# Altium PCB PCB_OPM MegaMod_2021-11-01.pcbdoc
Units mil, origin at the board's own origin, x right, y up, seen from the top; angles counter-clockwise.
Board outline 4520 x 3340 mil, 2 copper layers (Top Layer, Bottom Layer); 31 components, 45 nets, 164 pads, 18 vias.
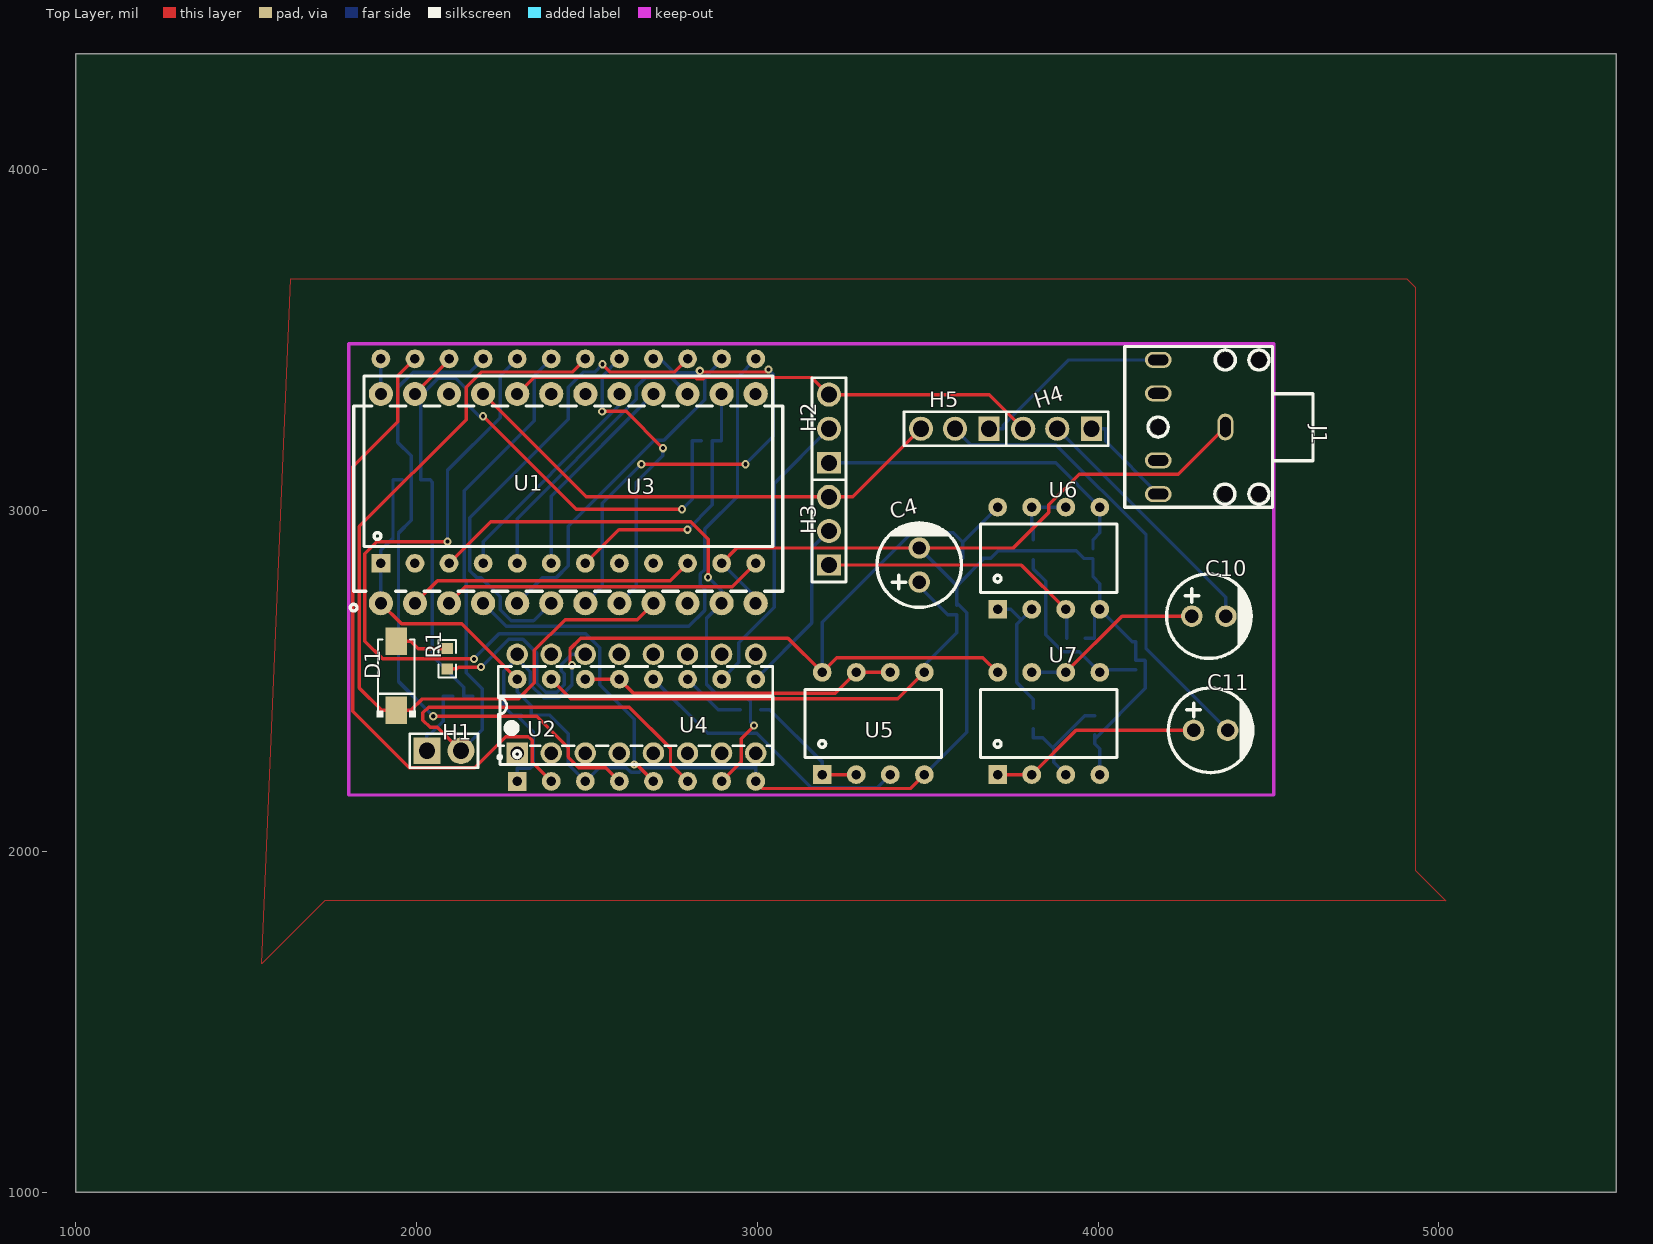
[diagram p0: Top Layer view]
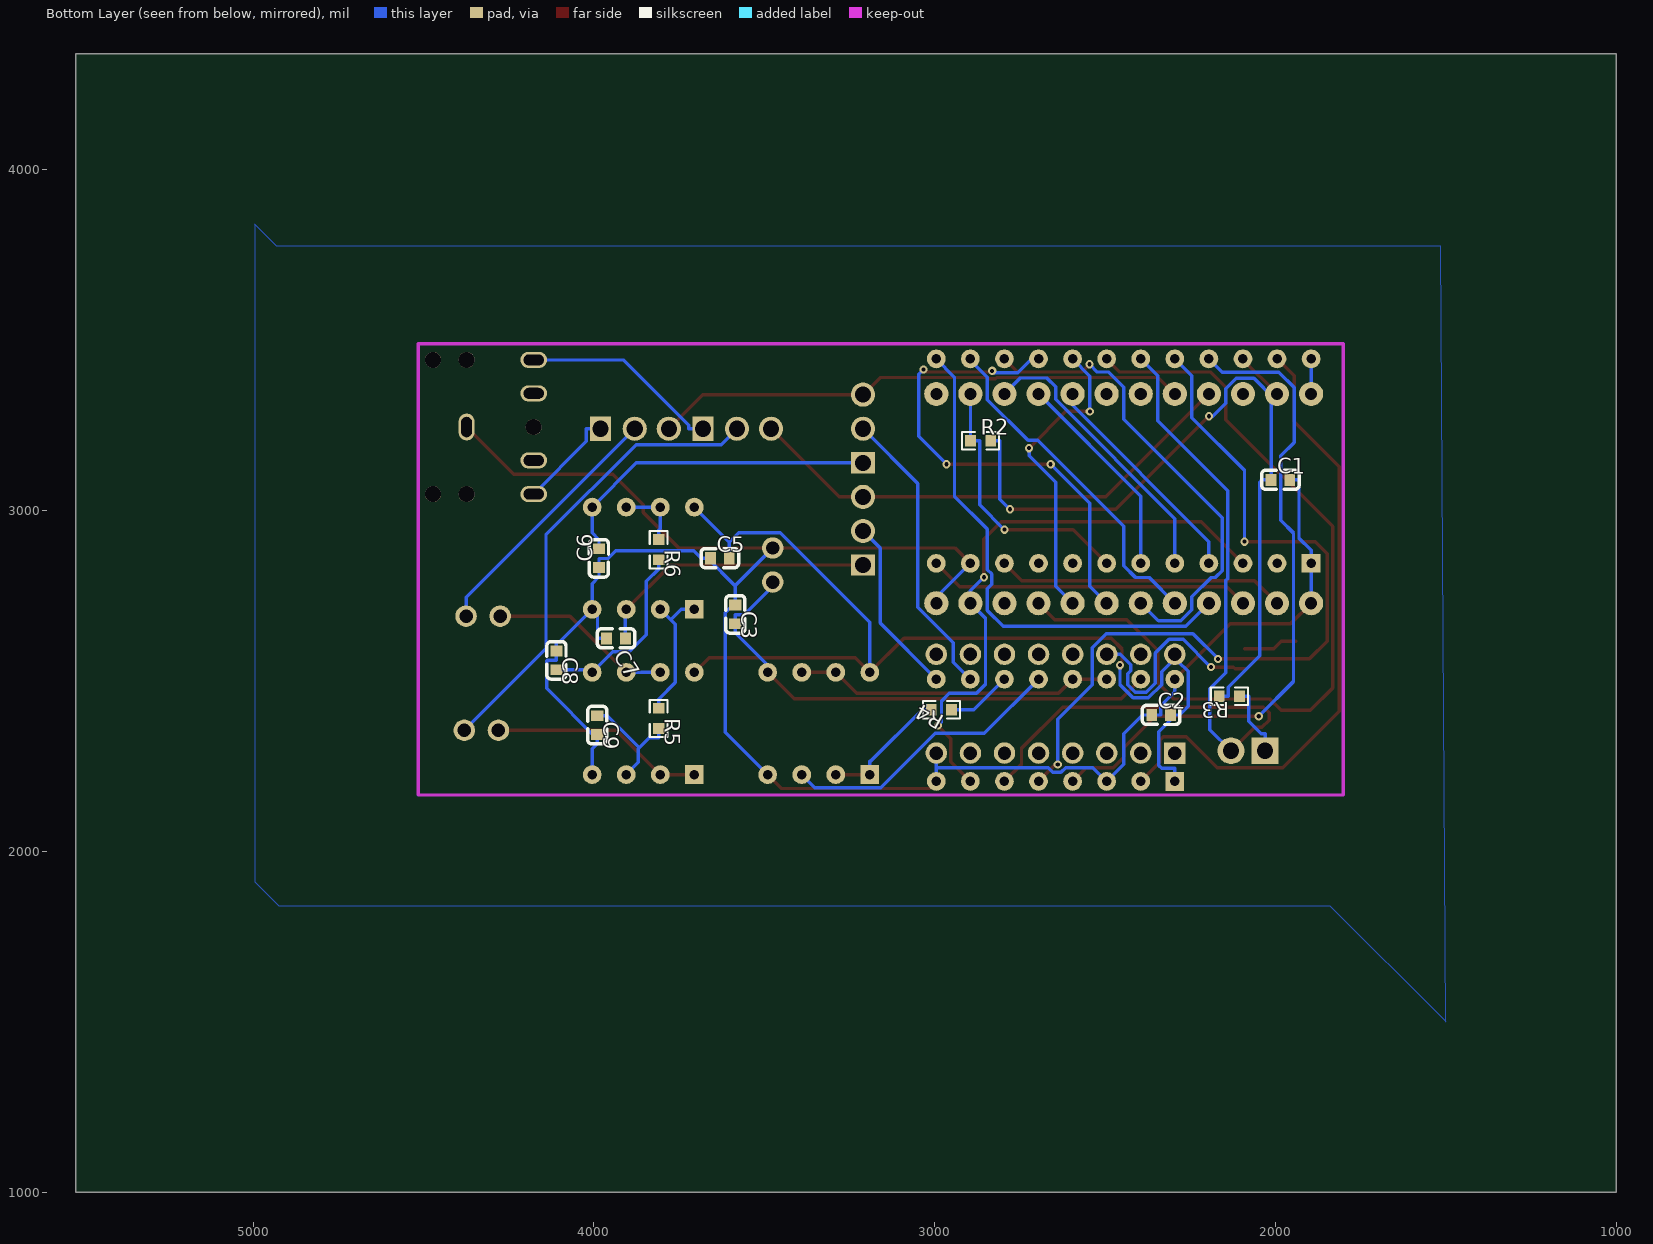
[diagram p1: Bottom Layer view, seen from below]

## Layer stack, top to bottom
Top Layer: signal copper (thickness not stored)
Dielectric: dielectric 12.6, FR-4, Dk 4.8
Bottom Layer: signal copper (thickness not stored)

## Board outline
5520,1000 1000,1000 1000,4340 5520,4340

## Components (designator, comment, footprint, x,y, rotation, side; value= is the part's Value field where it differs from the comment)
C1 "0.1u" C0603 1985,3090 r0 bottom
C2 "0.1u" C0603 2335,2400 r0 bottom
C3 "0.1u" C0603 3585,2695 r90 bottom
C4 "10uF" CAP-TH_BD6.3-P2.50-D1.0-FD 3475,2840 r90 top
C5 "0.1u" C0603 3630,2860 r0 bottom
C6 "1.8n" C0603 3985,2860 r270 bottom
C7 "1.8n" C0603 3935,2625 r180 bottom
C8 "10n" C0603 4110,2560 r90 bottom
C9 "10n" C0603 3990,2370 r90 bottom
C10 "4.7uF" CAP-TH_BD6.3-P2.50-D1.0-FD 4325,2690 r0 top
C11 "4.7uF" CAP-TH_BD6.3-P2.50-D1.0-FD 4330,2355 r0 top
D1 "SS14" SMA_L4.4-W2.8-LS5.4-RD 1940,2515 r90 top
H1 "YM2414B 兼容" HDR-TH_2P-P2.54-V-M 2080,2295 r0 top
H2 "Header-Male-2.54_1x3" HDR-TH_3P-P2.54-V-M-1 3210,3240 r90 top
H3 "Header-Male-2.54_1x3" HDR-TH_3P-P2.54-V-M-1 3210,2940 r90 top
H4 "Header-Male-2.54_1x3" HDR-TH_3P-P2.54-V-M-1 3880,3240 r180 top
H5 "Header-Male-2.54_1x3" HDR-TH_3P-P2.54-V-M-1 3580,3240 r180 top
J1 "PJ-307C" AUDIO-TH_PJ307C 4275,3245 r270 top
R1 "1k" R0603#1 2090,2565 r90 top
R2 "62k" R0603#2 2865,3205 r0 bottom
R3 "2.2k" R0603#2 2135,2455 r180 bottom
R4 "100" R0603#2 2980,2415 r180 bottom
R5 "3.6k" R0603#2 3810,2390 r90 bottom
R6 "3.6k" R0603#2 3810,2885 r90 bottom
U1 "MegaGRRL IC-FM" DIP-24_L32.0-W13.8-P2.54-LS15.6-BL 2445,3035 r0 top
U2 "MegaGRRL IC-DCSG" DIP-16_L20.4-W5.8-P2.54-LS7.6-BL 2644.88,2433.07 r0 top
U3 "YM2151" DIP24-600 2445,3145 r0 top
U4 "YM3012" DIP16 2645,2355 r0 top
U5 "SA5532AP" DIP8 3340,2375 r0 top
U6 "SA5532AP" DIP8 3855,2860 r0 top
U7 "SA5532AP" DIP8 3855,2375 r0 top

## Footprints (in the part's own frame and the unit in brackets; to place one, negate y for a bottom-side part, rotate by r counter-clockwise, add the part's x,y. Pads: shape width x height; smd on the part's side, far side on the other; paste and mask are expansions set on the pad)
AUDIO-TH_PJ307C [mm]
  oval 2x1.2 hole 0.8 slot 1.5 at 0 deg: 1(0,2.5)
  oval 1.2x2 hole 0.8 slot 1.5 at 90 deg: 2(5,-2.5) 3(2.489,-2.5) 4(-2.511,-2.5) 5(-5,-2.5)
  round 1.2 hole 1.2 unplated: ""(-5,2.5) ""(-5,5) ""(0,-2.5) ""(5,2.5) ""(5,5)
  silkscreen extent -6.01,-4.99 5.99,9.03
C0603 [mm]
  rect 0.8x0.9 smd: 1(0.7,0) 2(-0.7,0)
  silkscreen extent -1.39,-0.72 1.41,0.71
CAP-TH_BD6.3-P2.50-D1.0-FD [mm]
  round 1.6 hole 1: 1(-1.27,0) 2(1.27,0)
  silkscreen extent -3.15,-3.15 3.17,3.15
DIP8 [mil]
  rect 55x55 hole 28: 1(-150,-150)
  round 55 hole 28: 2(-50,-150) 3(50,-150) 4(150,-150) 5(150,150) 6(50,150) 7(-50,150) 8(-150,150)
  silkscreen extent -200,-100 200,100
DIP16 [mil]
  rect 55x55 hole 28: 1(-350,-150)
  round 55 hole 28: 2(-250,-150) 3(-150,-150) 4(-50,-150) 5(50,-150) 6(150,-150) 7(250,-150) 8(350,-150) 9(350,150) 10(250,150) 11(150,150) 12(50,150) 13(-50,150) 14(-150,150) 15(-250,150) 16(-350,150)
  silkscreen extent -400,-100 400,100
DIP24-600 [mil]
  rect 55x55 hole 28: 1(-550,-300)
  round 55 hole 28: 2(-450,-300) 3(-350,-300) 4(-250,-300) 5(-150,-300) 6(-50,-300) 7(50,-300) 8(150,-300) 9(250,-300) 10(350,-300) 11(450,-300) 12(550,-300) 13(550,300) 14(450,300) 15(350,300) 16(250,300) 17(150,300) 18(50,300) 19(-50,300) 20(-150,300) 21(-250,300) 22(-350,300) 23(-450,300) 24(-550,300)
  silkscreen extent -600,-250 600,250
DIP-16_L20.4-W5.8-P2.54-LS7.6-BL [mm]
  rect 1.6x1.6 hole 1: 1(-8.89,-3.68)
  round 1.6 hole 1: 2(-6.35,-3.68) 3(-3.81,-3.68) 4(-1.27,-3.68) 5(1.27,-3.68) 6(3.81,-3.68) 7(6.35,-3.68) 8(8.89,-3.68) 9(8.89,3.68) 10(6.35,3.68) 11(3.81,3.68) 12(1.27,3.68) 13(-1.27,3.68) 14(-3.81,3.68) 15(-6.35,3.68) 16(-8.89,3.68)
  silkscreen extent -10.31,-4.1 10.16,2.77
DIP-24_L32.0-W13.8-P2.54-LS15.6-BL [mm]
  round 1.8 hole 0.9: 1(-13.97,-7.8) 2(-11.43,-7.8) 3(-8.89,-7.8) 4(-6.35,-7.8) 5(-3.81,-7.8) 6(-1.27,-7.8) 7(1.27,-7.8) 8(3.81,-7.8) 9(6.35,-7.8) 10(8.89,-7.8) 11(11.43,-7.8) 12(13.97,-7.8) 13(13.97,7.8) 14(11.43,7.8) 15(8.89,7.8) 16(6.35,7.8) 17(3.81,7.8) 18(1.27,7.8) 19(-1.27,7.8) 20(-3.81,7.8) 21(-6.35,7.8) 22(-8.89,7.8) 23(-11.43,7.8) 24(-13.97,7.8)
  silkscreen extent -16.26,-8.38 16,6.9
HDR-TH_2P-P2.54-V-M [mm]
  rect 2x2 hole 1.2: 1(-1.27,0)
  round 2 hole 1.2: 2(1.27,0)
  silkscreen extent -2.54,-1.27 2.54,1.27
HDR-TH_3P-P2.54-V-M-1 [mm]
  rect 1.575x1.8 hole 1.2: 1(-2.54,0)
  round 1.8 hole 1.2: 2(0,0) 3(2.54,0)
  silkscreen extent -3.81,-1.27 3.81,1.27
R0603#1 [mil]
  rect 31.75x34.02 smd: 1(-29.66,0) 2(29.66,0)
  silkscreen extent -55,-26 55,26
R0603#2 [mil]
  rect 31.75x34.02 smd: 1(29.66,0) 2(-29.66,0)
  silkscreen extent -55,-26 55,26
SMA_L4.4-W2.8-LS5.4-RD [mm]
  rect 2.046x1.62 smd: 1(-2.566,0) 2(2.565,0)
  silkscreen extent -3.08,-1.44 2.7,1.44

## Via types
v1: diameter 24.02, hole 12.01, Top Layer to Bottom Layer, 18 vias

## Nets (pads, with @x,y where several pads share a name; then routed paths per layer and width w, separated by ;. In a path a pad name is that pad's centre, name@x,y a point inside that pad or via, vN(x,y) a via of type N, cw(c..) or ccw(c..) an arc to the next point about the centre after c; other vN are vias at no path point)
/CS: R2.1 U1.14 U3.7 | length 796.5
  Top Layer w10: U3.7 2593.72,2943.72 v1(2795,2943.72)
  Bottom Layer w10: v1(2795,2943.72) 2867.71,3016.43 2867.71,3205 R2.1 2894.66,3341.75 U1.14
/IC: U1.11 U3.3 U4.7 | length 1722.3
  Top Layer w10: U3.3 2217.35,2967.35 2804.13,2967.35 2855.32,2916.16 v1(2855.32,2804.26) ; U4.7 2952.34,2262.34 2952.34,2330.76 v1(2990.41,2368.83)
  Bottom Layer w10: v1(2855.32,2804.26) 2895,2764.58 U1.11 2850.59,2683.5 2850.59,2489.72 2877.09,2463.22 2956.71,2463.22 2979.77,2440.16 2979.77,2379.47 v1(2990.41,2368.83)
/RD: U1.16 U3.6 | length 621.4
  Bottom Layer w10: U3.6 2395,3042.09 U1.16
/WR: U1.15 U3.5 | length 842.9
  Bottom Layer w10: U3.5 2295,2976.31 2645,3326.31 2645,3362.83 2671.01,3388.84 2748.25,3388.84 U1.15
A0: U1.17 U3.4 | length 662.8
  Bottom Layer w10: U3.4 2195,2908.67 2595,3308.67 U1.17
A.VCC: C2.2 C5.2 U2.16 U4.1 U5.8 U6.8 U7.8 | length 3063.7
  Top Layer w10: v1(2455.8,2546.04) 2450.02,2551.82 2450.02,2593.58 2481.63,2625.19 3089.81,2625.19 U5.8 3233.39,2568.39 3661.61,2568.39 U7.8
  Bottom Layer w10: U2.16 U2.16@2294.88,2556.74 ; U4.1 2295,2243.57 2333.57,2243.57 2341.76,2251.76 2341.76,2350.2 C2.2@2291.96,2400 ; C2.2 2307.2,2400 2303.29,2400 C2.2@2291.96,2400 ; v1(2455.8,2546.04) 2455.8,2488.49 2417.65,2450.34 2372.36,2450.34 2333.58,2489.12 2333.58,2527.46 2304.3,2556.74 U2.16@2294.88,2556.74 ; U5.8 3190,2671.75 3453.39,2935.14 3574.74,2935.14 3602.44,2907.44 ; C5.2 3602.44,2907.44 ; U6.8 3602.44,2907.44 ; C2.2@2291.96,2400 2280.62,2400 2255.62,2425 2255.62,2528.08 2284.28,2556.74 U2.16@2294.88,2556.74
BC: U4.13 U4.14 U5.6 U5.7 | length 937.6
  Top Layer w10: U4.14 U4.13 2636.41,2463.59 3228.59,2463.59 U5.7 U5.6
C10_2: C10.2 H4.2 | length 755
  Bottom Layer w10: H4.2 4375,2745 C10.2
C11_2: C11.2 H5.2 | length 1362.6
  Bottom Layer w10: H5.2 3626.51,3193.49 3876.06,3193.49 4140.51,2929.04 4140.51,2594.49 C11.2
CH1: H3.2 U4.9 | length 524.1
  Bottom Layer w10: U4.9 3159.95,2669.95 3159.95,2889.95 H3.2
CH2: H2.2 U4.10 | length 865.5
  Bottom Layer w10: U4.10 2944.9,2554.9 2944.9,2611.44 3049.34,2715.88 3049.34,3079.34 H2.2
COM: R4.1 U4.11 | length 192.6
  Bottom Layer w10: U4.11 2885,2415 R4.1
D0: U1.2 U3.10 | length 848.5
  Top Layer w10: U1.2 2061.08,2793.99 2744,2794 U3.10
D1: U1.3 U3.12 | length 948.5
  Top Layer w10: U1.3 2143.05,2775.96 2925.96,2775.96 U3.12
D2: U1.4 U3.13 | length 1508.7
  Bottom Layer w10: U1.4 2263.09,2659.82 2798.33,2659.82 2845,2706.49 2845,2770.2 2832.24,2782.96 2832.24,2813.82 2845,2826.58 2845,2945.72 2941.68,3042.4 2941.68,3391.68 U3.13
D3: U1.5 U3.14 | length 1006
  Bottom Layer w10: U1.5 2370.57,2803.48 2410.45,2803.48 2445,2838.03 2445,2954.14 2696.84,3205.98 2725.88,3205.98 2845,3325.1 2845,3391.29 2895,3441.29 U3.14
D4: U1.6 U3.15 | length 1405.4
  Top Layer w10: v1(2545.24,3429.28) 2568.1,3406.42 2756.42,3406.42 U3.15
  Bottom Layer w10: U1.6 2343.01,2675.92 2278.04,2675.92 2245,2708.96 2245,2746.33 2187.87,2803.46 2175.96,2803.46 2155.92,2823.5 2155.92,2978.77 2445,3267.85 2445,3362.36 2489.06,3406.42 2522.38,3406.42 v1(2545.24,3429.28)
D5: U1.7 U3.16 | length 1461.4
  Top Layer w10: v1(2659.36,3135.86) v1(2964.76,3135.86) ; v1(2831.03,3409.97) 2834.58,3406.42 3024.73,3406.42 v1(3032.54,3414.23)
  Bottom Layer w10: U1.7 2545.01,2777.92 2545.01,3021.51 v1(2659.36,3135.86) ; U3.16 2714.86,3445 2756.12,3403.74 2824.8,3403.74 v1(2831.03,3409.97) ; v1(2964.76,3135.86) 3046.5,3217.6 3046.5,3400.27 v1(3032.54,3414.23)
D6: U1.8 U3.17 | length 905.8
  Top Layer w10: v1(2544.48,3290.8) 2614.73,3290.8 v1(2722.63,3182.9)
  Bottom Layer w10: v1(2544.48,3290.8) 2544.48,3394.48 U3.17 ; U1.8 2645.01,2777.92 2645.01,3082.52 2722.63,3160.14 v1(2722.63,3182.9)
D7: D1.1 U1.9 U3.18 | length 2473
  Top Layer w10: U3.18 2456.39,3406.39 2189.03,3406.39 2145,3362.36 2145,3266.32 1831.86,2953.18 1831.86,2479.18 1897.04,2414 D1.1 1982.96,2414 2015.84,2446.88 2297.66,2446.88 2345,2494.22 2345,2589.37 2435.46,2679.83 2646.92,2679.83 U1.9
GND: C1.2 C2.1 C3.1 C4.2 C5.1 C6.1 C7.2 C8.1 C9.2 J1.1 U1.1 U1.12 U2.8 U3.1 U3.11 U4.3 U4.8 U4.16 U5.4 U6.4 U7.4 | length 6417.3
  Top Layer w10: U1.1 1955.54,2667.37 2132.63,2667.37 U4.16 ; U3.11 2940,2890 C4.2 3750.85,2890 3855.01,2994.16 3855.01,3016.91 3944.24,3106.14 4234.57,3106.14 J1.1 ; U4.8 3015.94,2184.06 3449.06,2184.06 U5.4
  Bottom Layer w10: U1.1 U3.1 1895,2864.29 1895,2883.57 1930.62,2919.19 1930.62,3090 C1.2 ; U4.16 2295,2467.56 2335.74,2426.82 2335.74,2400 C2.1 2389.38,2400 2444.9,2344.48 2444.9,2255.1 U4.3 2535.25,2245.25 2615.48,2245.25 2629,2231.73 2652.66,2231.73 2666.55,2245.62 2994.88,2245.62 ; U3.11 2995,2745 U1.12 ; U2.8 2994.88,2245.62 ; U4.8 2994.88,2205.12 2994.88,2245.62 ; C4.2 3585,2780 ; U5.4 3613.96,2348.96 3613.96,2699.86 C3.1@3585,2728.82 ; C3.1 C3.1@3585,2728.82 ; C5.1 C5.1@3666.02,2860 ; C7.2 3989.38,2625 3989.38,2694.38 U6.4 ; C9.2 C9.2@3990,2329.03 ; U7.4 4005,2300.62 3990,2315.62 C9.2@3990,2329.03 ; C3.1@3585,2728.82 3585,2739.1 3585,2780 ; 3585,2780 3586.02,2780 C5.1@3666.02,2860 ; C5.1@3666.02,2860 3684.38,2860 3706.68,2882.3 3935.14,2882.3 3958.18,2859.26 3985,2859.26 C6.1 3985,2805.62 4005,2785.62 U6.4 ; C9.2@3990,2329.03 4138.8,2477.83 4138.8,2558.76 4136.82,2560.74 4110,2560.74 C8.1 4110,2614.38 4100.62,2614.38 U6.4
H1_1: H1.1 R3.1 | length 213.9
  Bottom Layer w10: H1.1 2030,2345.44 2041.73,2345.44 2078.4,2382.11 2078.4,2455 R3.1
IN.L: H3.3 H5.3 U1.21 | length 1493
  Top Layer w10: U1.21 2497.09,3040 H3.3 3280,3040 H5.3
IN.R: H2.3 H4.3 U1.20 | length 1570
  Top Layer w10: U1.20 2343.16,3390.25 2818.11,3390.25 2821.47,3386.89 2840.6,3386.89 2843.96,3390.25 3159.75,3390.25 H2.3 3680,3340 H4.3
MCLK: U1.24 U3.24 | length 102.9
  Bottom Layer w10: U1.24 U3.24
OUT.L: H5.1 J1.5 | length 586.4
  Bottom Layer w10: H5.1 3722.07,3240 3722.07,3250.52 3913.4,3441.85 J1.5
OUT.R: H4.1 J1.2 | length 297.9
  Bottom Layer w10: H4.1 4022.07,3240 4022.07,3202.66 J1.2
PHI1: U3.23 U4.2 | length 1890.5
  Top Layer w10: U3.23 1945,3395 1945,3260.62 1812.68,3128.3 1812.68,2410.6 1978.73,2244.55 2170.37,2244.55 2261.41,2335.59 2328.81,2335.59 2339.18,2325.22 2339.18,2260.82 U4.2
R1_2: D1.2 R1.2 | length 158.8
  Top Layer w10: D1.2 1982.96,2616 2004.3,2594.66 R1.2
RB: C3.2 C4.1 U4.15 U5.5 | length 1516.5
  Top Layer w10: U4.15 2452.5,2447.5 3412.5,2447.5 U5.5
  Bottom Layer w10: C4.1 3475,2777.44 3558.18,2694.26 3585,2694.26 C3.2 3585,2640.62 3490,2545.62 U5.5
SH1: U3.20 U4.5 | length 2355.1
  Top Layer w10: v1(2090.56,2908.49) 1883.14,2908.49 1847.96,2873.31 1847.96,2616.42 1899.74,2564.64 v1(2168.11,2564.64) ; v1(2638.56,2254.81) 2645.19,2254.81 U4.5
  Bottom Layer w10: v1(2090.56,2908.49) 2090.56,3118.18 2245,3272.62 2245,3395 U3.20 ; v1(2168.11,2564.64) 2241.6,2638.13 2496.84,2638.13 2537.7,2597.27 2537.7,2488.13 2638.56,2387.27 v1(2638.56,2254.81)
SH2: H1.2 U3.19 U4.6 | length 2374.8
  Top Layer w10: H1.2 2061.01,2363.99 2039.28,2363.99 2018.23,2385.04 2018.23,2406.1 2034.88,2422.75 2624.54,2422.75 2744.9,2302.39 2744.9,2255.1 U4.6
  Bottom Layer w10: H1.2 2192.11,2357.11 2192.11,2477.16 2144.98,2524.29 2144.98,2795.02 2139.82,2800.18 2139.82,3058.14 2345,3263.32 2345,3395 U3.19
SO: U3.21 U4.4 | length 1965
  Top Layer w10: v1(2048.79,2396.17) 2352.38,2396.17 2444.9,2303.65 2444.9,2276.53 2475.81,2245.62 2554.38,2245.62 U4.4
  Bottom Layer w10: v1(2048.79,2396.17) 1946.72,2498.24 1946.72,2934.07 1984.27,2971.62 1984.27,3160.36 1945,3199.63 1945,3361.07 1989.48,3405.55 2155.55,3405.55 U3.21
TOBUF: U4.12 U5.3 | length 842.9
  Bottom Layer w10: U4.12 2854.25,2345.75 2998.22,2345.75 3157.55,2186.42 3351.42,2186.42 U5.3
U2_14: R1.1 U2.14 | length 650.2
  Top Layer w10: R1.1 2118.08,2535.34 2123.17,2540.43 v1@2189.05,2540.43
  Bottom Layer w10: v1@2189.05,2540.43 2270.63,2622.01 2312.11,2622.01 2352.35,2581.77 2352.35,2493.11 2379.03,2466.43 2410.98,2466.43 2433.57,2489.02 2433.57,2520.98 2424.7,2529.85 2424.7,2547.58 2455.07,2577.95 U2.14
  other v1: 2189.05,2540.43
U5_1: R4.2 U5.1 U5.2 | length 381.6
  Top Layer w10: U5.1 U5.2
  Bottom Layer w10: R4.2 3036.6,2415 3188.03,2263.57 3190,2263.57 U5.1
U6_1: R5.1 U6.1 U6.2 | length 410.7
  Bottom Layer w10: U6.1 3743.57,2710 3774.29,2679.29 ; U6.2 3774.29,2679.29 ; R5.1 3810,2446.6 3761.26,2495.34 3761.26,2666.26 3774.29,2679.29
U6_3: C7.1 H3.1 U6.3 | length 834.9
  Top Layer w10: H3.1 3775,2840 U6.3
  Bottom Layer w10: U6.3 3907.44,2707.56 C7.1
U6_5: C6.2 H2.1 U6.5 | length 979.6
  Bottom Layer w10: H2.1 3875,3140 U6.5 4005,2934.38 3985,2914.38 C6.2
U6_6: R6.1 U6.6 U6.7 | length 197.4
  Bottom Layer w10: R6.1 3810,2941.6 3805,2946.6 U6.7 U6.6
U7_1: C11.1 U7.1 U7.2 | length 628.8
  Top Layer w10: U7.1 3743.57,2225 U7.2 3935,2355 C11.1
U7_3: C9.1 R5.2 U7.3 | length 352.5
  Bottom Layer w10: R5.2 3810,2333.4 3836.94,2333.4 3867,2303.35 ; U7.3 3869.42,2260.58 3869.42,2300.92 3867,2303.35 ; C9.1 3961.21,2397.56 3867,2303.35
U7_5: C8.2 R6.2 U7.5 | length 547.2
  Bottom Layer w10: R6.2 3810,2828.4 3846.41,2791.99 3846.41,2635.84 3896.66,2585.59 3944.41,2585.59 U7.5 4012.44,2532.44 C8.2
U7_6: C10.1 U7.6 U7.7 | length 538.3
  Top Layer w10: U7.6 4070,2690 C10.1
  Bottom Layer w10: U7.7 U7.6
VCC: C1.1 R2.2 R3.2 U1.23 U3.22 | length 2355.3
  Top Layer w10: U1.23 2095,3442.09 U3.22 ; v1(2195,3276.77) 2468.09,3003.68 v1(2779.14,3003.68)
  Bottom Layer w10: U1.23 U1.23@2005.53,3331.57 ; R3.2 2137.71,2455 2137.71,2481.95 2046.15,2573.51 2046.15,3083.23 2039.38,3090 C1.1 2012.56,3324.53 U1.23@2005.53,3331.57 ; v1(2195,3276.77) 2183.32,3276.77 2145,3315.09 2145,3357.86 2114.26,3388.6 2062.56,3388.6 U1.23@2005.53,3331.57 ; v1(2779.14,3003.68) 2808.4,3032.94 2808.4,3205 R2.2
pads on no net: J1. J1.3 J1.4 U1.10 U1.13 U1.18 U1.19 U1.22 U2.1 U2.2 U2.3 U2.4 U2.5 U2.6 U2.7 U2.9 U2.10 U2.11 U2.12 U2.13 U2.15 U3.2 U3.8 U3.9

## Polygon pours and split planes (outlines as drawn)
GND on Bottom Layer (solid): 1515,3775 4930,3775 4995,3840 4995,1910 4925,1840 1840,1840 1505,1505 1500,1500
GND on Top Layer (solid): 1630,3680 4905,3680 4930,3655 4930,1945 5020,1855 1730,1855 1545,1670